# EAGLE board PICkit Adapter (EAGLE 6.3)
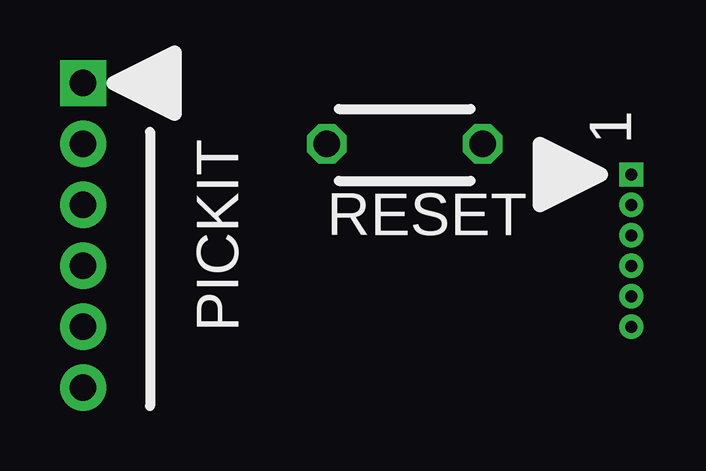
[diagram p0: board, top side]
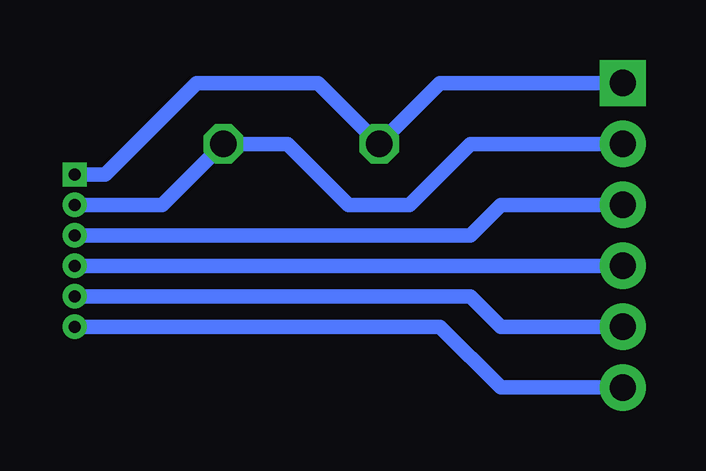
[diagram p1: board, bottom side, seen from below]

No outline drawn. Coordinates in mm, seen from the top.
Copper layers (1*16): Top 0.035mm / dielectric 1.5mm / Bottom 0.035mm
Design rules "default": minimum track width 10mil, minimum drill 24mil, track to track 8mil, track to pad 8mil, pad to pad 8mil, via to via 8mil, smd to smd 8mil, copper to edge 40mil, drill to drill 8mil, minimum pad ring 10mil, minimum via ring 8mil, stop-mask expansion 4mil, vias tented up to drill 0mil, thermal gap 10mil

## Footprints (pad centres in the part's own frame; a part is rotated, then mirrored left to right if it is on the bottom)
3X6MM = drill 1.1 octagon: 1 0,0; 2 6.5,0
PINS_6_1MM27 = drill 0.5 square: 1 0,0 | drill 0.5: 2 1.27,0; 3 2.54,0; 4 3.81,0; 5 5.08,0; 6 6.35,0
PINS_6_PICKIT3_TEXT = drill 1.1 pad 1.93 square: 1 0,0 | drill 1.1 pad 1.93: 2 0,-2.54; 3 0,-5.08; 4 0,-7.62; 5 0,-10.16; 6 0,-12.7

## Placement (x,y rotation side)
RESET  [3X6MM]  12.7,12.7 0 top
U$2  PICKIT3/1.27  [PINS_6_1MM27]  25.4,11.43 270 top
U$3  PICKIT  [PINS_6_PICKIT3_TEXT]  2.54,15.24 0 top

## Library data of the parts
RESET U$2 U$3 = nolan-utsa

## Nets
N$1: RESET.1 U$2.1 U$3.1
N$2: RESET.2 U$2.2 U$3.2
N$3: U$2.3 U$3.3
N$4: U$2.4 U$3.4
N$5: U$2.5 U$3.5
N$6: U$2.6 U$3.6

## Tracks (layer width: path | path; a pad name or v marks a point on that pad's centre or on a via)
N$1
  Bottom 0.61: U$3.1 10.16,15.24 RESET.1 15.24,15.24 20.32,15.24 24.13,11.43 U$2.1
N$2
  Bottom 0.61: U$3.2 8.89,12.7 11.43,10.16 13.97,10.16 16.51,12.7 RESET.2 21.74,10.16 U$2.2
N$3
  Bottom 0.61: U$2.3 8.89,8.89 7.62,10.16 U$3.3
N$4
  Bottom 0.61: U$2.4 U$3.4
N$5
  Bottom 0.61: U$2.5 8.89,6.35 7.62,5.08 U$3.5
N$6
  Bottom 0.61: U$2.6 10.16,5.08 7.62,2.54 U$3.6

## Text on the board
tPlace: 1 | RESET